# Altium PCB Walrus.PcbDoc (part 2 of 3)
Units mm, origin at the board's own origin, x right, y up, seen from the top; angles counter-clockwise.
Board outline 65 x 30.33 mm, 2 copper layers (Top, Bottom), stack 1.545 mm thick; 106 components, 76 nets, 395 pads, 305 vias.
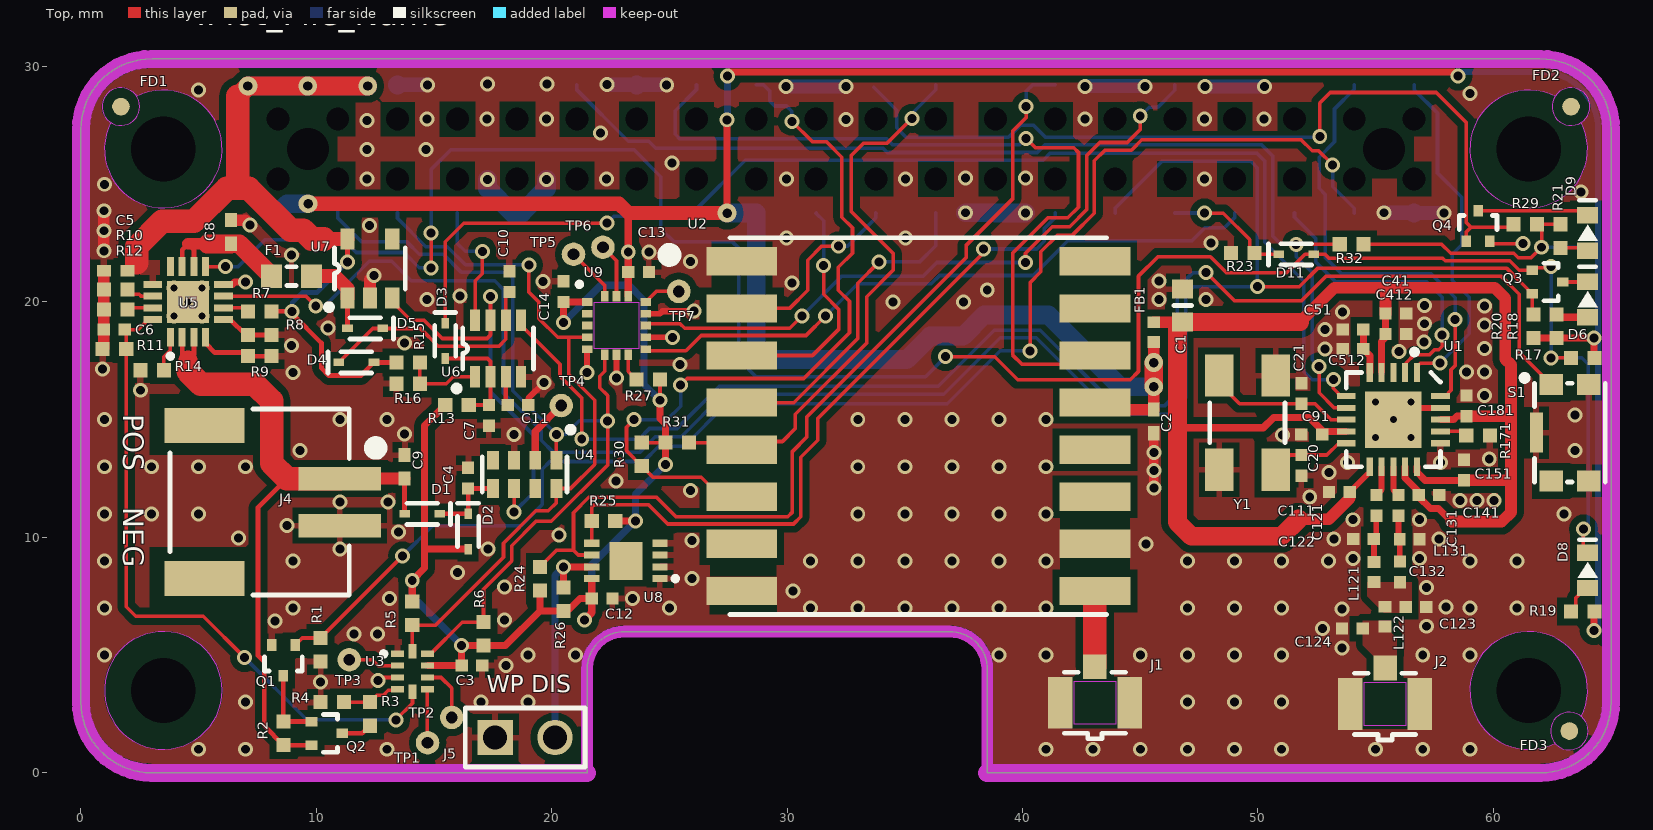
[diagram p0: Top view]

## Part data (continued)
U2: library part IC_000286, "ISM TRANSCEIVER MODULE", Case=MODULE, Mfg1PartNumber=RFM69HCW-915S2, OperatingTemp="-40C to 85C", ClassName=DirectPour, ComponentLink1Description="Mfg1 Datasheet", ComponentLink1URL=http://www.hoperf.com/upload/rf/RFM69HCW-V1.1.pdf, CreationDate=5/27/2017, Creator="R. Casciola", Distributor=https://www.sparkfun.com/products/13909, Height=1.8mm(70.9mils), LeadFree=True, MDLPartNumber=IC_000286, Mfg1=HopeRF, Modifer="R. Casciola", ModificationDate=8/24/2017, Mounting=SMT, Pins=16, RoHS=True
U3: library part IC_000284, "Ultra-Small, Low-Power, I2C-Compatible, 3.3-kSPS, 12-Bit ADC With Internal Reference, Oscillator, and Programmable Comparator", Case=X2QFN, Mfg1PartNumber=ADS1015IRUGR,ADS1015IRUGT, OperatingTemp="-40C to 85C", ComponentLink1Description="Mfg1 Datasheet", ComponentLink1URL=http://www.ti.com/lit/ds/symlink/ads1013.pdf, CreationDate=5/27/2017, Creator="R. Casciola", Distributor=https://www.digikey.com/product-detail/en/texas-instruments/ADS1015IRUGR/296-43557-1-ND/5864781, Height=0.40mm(15.7mils), LeadFree=True, MDLPartNumber=IC_000284, Mfg1="Texas Instruments", Mounting=SMT, Packaging=T&R, PartMarking=N7J, Pins=10, RoHS=True
U4: library part IC_000295, "Low-power serial real-time clock (RTCs) with alarm", Case=LCC-8, Mfg1PartNumber=M41T62LC6F, OperatingTemp="-40C to 85C", ComponentLink1Description="Mfg1 Datasheet", ComponentLink1URL=http://www.st.com/content/ccc/resource/technical/document/datasheet/c8/66/38/71/c4/ac/49/9e/CD00019860.pdf/files/CD00019860.pdf/jcr:content/translations/en.CD00019860.pdf, CreationDate=7/23/2017, Creator="R. Casciola", Distributor=https://www.digikey.com/product-detail/en/stmicroelectronics/M41T62LC6F/497-11275-1-ND/2673274, Height=0.80mm(31.5mils), LeadFree=True, MDLPartNumber=IC_000295, Mfg1=STMicroelectronics, Mounting=SMT, Packaging=T&R, Pins=8, RoHS=True
U5: library part IC_000195, "USB-FRIENDLY LITHIUM-ION BATTERY CHARGER AND POWER-PATH MANAGEMENT IC", Case=QFN16, Mfg1PartNumber=BQ24232RGTR,BQ24232RGTT, OperatingTemp="-40C to 85C", ComponentLink1Description="Mfg1 Datasheet", ComponentLink1URL=http://www.ti.com/lit/ds/symlink/bq24232.pdf, CreationDate=3/14/2013, Creator="R. Casciola", Distributor=https://www.digikey.com/product-detail/en/texas-instruments/BQ24232RGTR/296-41207-1-ND/5222663, Height=1.00mm(39.4mils), LeadFree=True, MDLPartNumber=IC_000195, Mfg1="Texas Instruments", Modifer="R. Casciola", ModificationDate=8/24/2017, Mounting=SMT, Packaging=T&R, PartMarking=NXK, Pins=16, RoHS=True
U6: library part IC_000294, "Pushbutton On/Off Controller with Automatic Turn-On", Case=TSOT23-8, Mfg1PartNumber=LTC2955CTS8-2#PBF,LTC2955CTS8-2#TRMPBF,LTC2955CTS8-2#TRPBF, OperatingTemp="0C to 70C", ComponentLink1Description="Mfg1 Datasheet", ComponentLink1URL=http://cds.linear.com/docs/en/datasheet/2955fa.pdf, CreationDate=7/22/2017, Creator="R. Casciola", Distributor=https://www.digikey.com/product-detail/en/linear-technology/LTC2955CTS8-2-TRMPBF/LTC2955CTS8-2-TRMPBFCT-ND/3065187, Height=1.00mm(39.4mils), LeadFree=True, MDLPartNumber=IC_000294, Mfg1="Linear Technology", Modifer="R. Casciola", ModificationDate=8/24/2017, Mounting=SMT, Packaging=T&R, PartMarking=LTGBN, Pins=8, RoHS=True
U7: library part IC_000293, "2.6A Low Loss Ideal Diode in ThinSOT", Case=TSOT23-5, Mfg1PartNumber=LTC4411ES5,LTC4411ES5#TRMPBF,LTC4411ES5#TRPBF, OperatingTemp="-40C to 85C", ComponentLink1Description="Mfg1 Datasheet", ComponentLink1URL=http://cds.linear.com/docs/en/datasheet/4411fa.pdf, CreationDate=7/16/2017, Creator="R. Casciola", Distributor=https://www.digikey.com/product-detail/en/linear-technology/LTC4411ES5-TRMPBF/LTC4411ES5-TRMPBFCT-ND/1754256, Height=1.00mm(39.4mils), LeadFree=True, MDLPartNumber=IC_000293, Mfg1="Linear Technology", Modifer="R. Casciola", ModificationDate=8/24/2017, Mounting=SMT, Packaging=T&R, PartMarking=LTAEN, Pins=5, RoHS=True
U8: library part IC_000300, "32-Kb I2C CMOS Serial EEPROM", Case=UDFN-8, Mfg1PartNumber=CAT24C32HU4I-GT3, OperatingTemp="-40C to 85C", ComponentLink1Description="Mfg1 Datasheet", ComponentLink1URL=http://www.onsemi.com/pub/Collateral/CAT24C32-D.PDF, CreationDate=8/2/2017, Creator="R. Casciola", Distributor=https://www.digikey.com/product-detail/en/on-semiconductor/CAT24C32HU4I-GT3/CAT24C32HU4I-GT3OSCT-ND/4927901, Height=0.55mm(21.7mils), LeadFree=True, MDLPartNumber=IC_000300, Mfg1="ON Seminconductor", Modifer="R. Casciola", ModificationDate=8/24/2017, Mounting=SMT, Packaging=T&R, Pins=8, RoHS=True
U9: library part IC_000038, "MEMS digital output motion sensor: ultra low-power high performance 3-axes “nano” accelerometer", Case=LGA-16, Mfg1PartNumber=LIS3DHTR, OperatingTemp="-40C to 85C", ComponentLink1Description="Mfg1 Datasheet", ComponentLink1URL=http://www.st.com/internet/com/TECHNICAL_RESOURCES/TECHNICAL_LITERATURE/DATASHEET/CD00274221.pdf, CreationDate=11/8/2010, Creator="R. Casciola", Distributor=https://www.digikey.com/product-detail/en/stmicroelectronics/LIS3DHTR/497-10613-1-ND/2334355, Height=1.00mm(39.4mils), LeadFree=True, MDLPartNumber=IC_000038, Mfg1=STMicroelectronics, Modifer="R. Casciola", ModificationDate=8/24/2017, Mounting=SMT, Packaging=TRAY, Pins=16, RoHS=True
Y1: library part XTAL_000024, "CERAMIC SMD CRYSTAL", Case=XTAL5032, LoadCapacitance=10pF, Mfg1PartNumber=ABM3B-26.000MHZ-10-1-U-T, OperatingTemp="-10C to 60C", Tolerance=±10ppm, Aging=±5ppm, ComponentLink1Description="Mfg1 Datasheet", ComponentLink1URL=http://www.abracon.com/Resonators/abm3b.pdf, CreationDate=8/13/2017, Creator="R. Casciola", Distributor=https://www.digikey.com/product-detail/en/abracon-llc/ABM3B-26.000MHZ-10-1-U-T/300-8219-1-ND/687912, Drive Level="100µW, max", ESR=50, Height=1.10mm(43.3mils), LeadFree=True, MDLPartNumber=XTAL_000024, Mfg1=Abracon, Mounting=SMT, Packaging=T&R, RoHS=True

## Free pads (board coordinates)
  round 0 hole 2.75 unplated mask+0.1: MTG(3.5,3.5) MTG(3.5,26.5) MTG(61.5,26.5) MTG(61.5,3.5)

## Via types
v1: diameter 0.635, hole 0.381, Top to Bottom, 288 vias
v2: diameter 0.635, hole 0.3, Top to Bottom, 10 vias
v3: diameter 0.8, hole 0.4, Top to Bottom, 7 vias